# EAGLE board Serial_LCD (EAGLE 6.5.0)
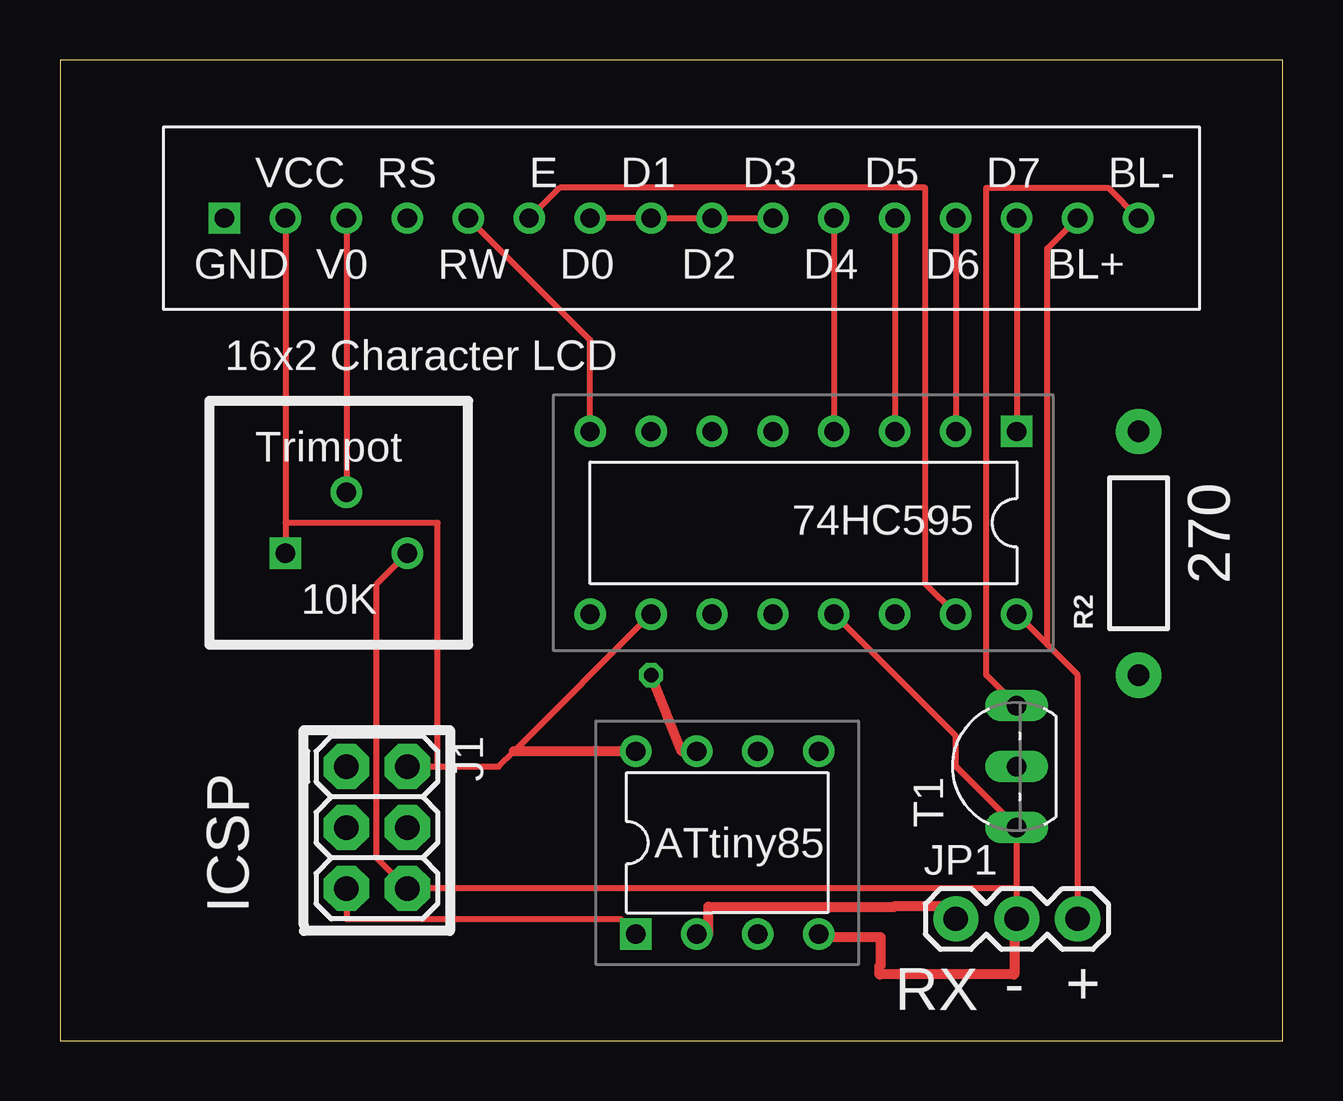
[diagram p0: board, top side]
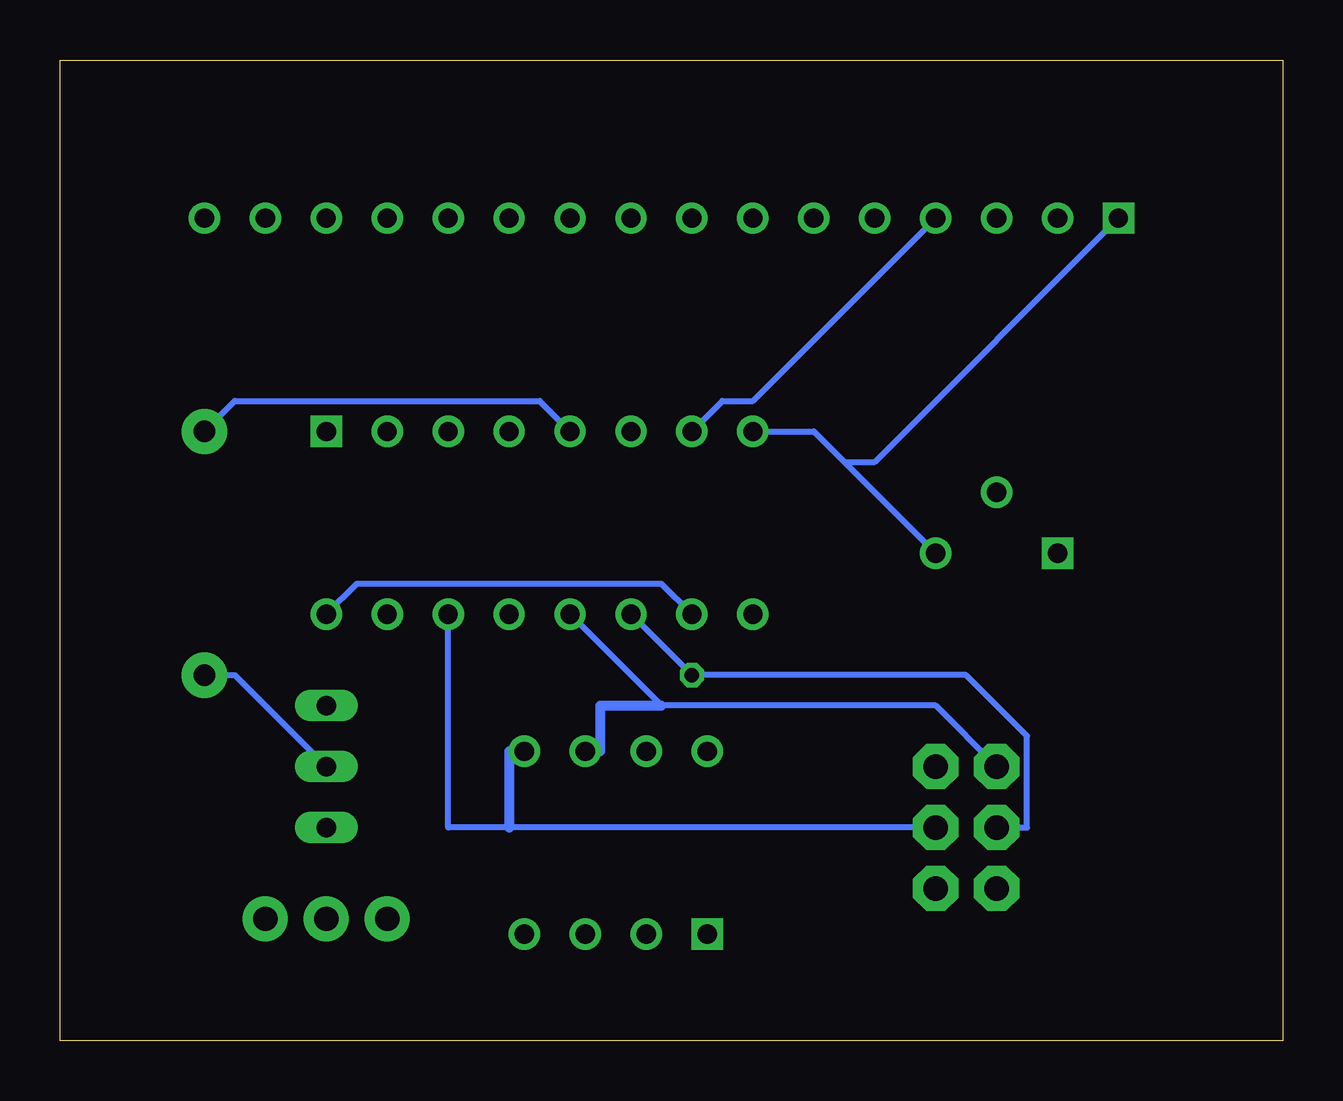
[diagram p1: board, bottom side, seen from below]

Size 50.98 x 40.88 mm. Coordinates in mm from the lower left corner, seen from the top.
Outline: 0,0 50.98,0 50.98,40.88 0,40.88 0,0
Copper layers (1*16): Top 0.035mm / dielectric 1.5mm / Bottom 0.035mm
Design rules "default": minimum track width 10mil, minimum drill 24mil, track to track 8mil, track to pad 8mil, pad to pad 8mil, via to via 8mil, smd to smd 8mil, copper to edge 40mil, drill to drill 8mil, minimum pad ring 10mil, minimum via ring 8mil, stop-mask expansion 4mil, vias tented up to drill 0mil, thermal gap 10mil

## Footprints (pad centres in the part's own frame; a part is rotated, then mirrored left to right if it is on the bottom)
2X3 = drill 1.016 pad 1.88 octagon: 1 0,0; 2 0,2.54; 3 2.54,0; 4 2.54,2.54; 5 5.08,0; 6 5.08,2.54
1X03 = drill 1.016 pad 1.88: 1 0,0; 2 2.54,0; 3 5.08,0
TRIMPOT-3386P = drill 0.8 square: P1 1.27,1.27 | drill 0.8: P2 3.81,3.81; P3 6.35,1.27
AXIAL-0.4 = drill 0.9 pad 1.88: P$1 -5.08,0; P$2 5.08,0
TO92-EBC-OVAL = drill 0.813 long: B 0,-1.27; C 2.54,-1.27; E -2.54,-1.27
SN74HC595N = drill 0.8: GND 17.78,0; OE 7.62,7.62; QA 2.54,7.62; QC 2.54,0; QD 5.08,0; QE 7.62,0; QF 10.16,0; QG 12.7,0; QH 15.24,0; QH' 17.78,7.62; RCLK 10.16,7.62; SER 5.08,7.62; SRCLK 12.7,7.62; SRCLR 15.24,7.62; VCC 0,7.62 | drill 0.8 square: QB 0,0
ATTINY85-20PU = drill 0.8: GND 8.255,0.635; PB0 8.255,8.255; PB1 5.715,8.255; PB2 3.175,8.255; PB3 3.175,0.635; PB4 5.715,0.635; VCC 0.635,8.255 | drill 0.8 square: PB5 0.635,0.635
16X2_LCD = drill 0.8: A 36.83,1.27; D0 16.51,1.27; D1 19.05,1.27; D2 21.59,1.27; D3 24.13,1.27; D4 26.67,1.27; D5 29.21,1.27; D6 31.75,1.27; D7 34.29,1.27; E 13.97,1.27; K 39.37,1.27; RS 8.89,1.27; RW 11.43,1.27; V0 6.35,1.27; VDD 3.81,1.27 | drill 0.8 square: VSS 1.27,1.27

## Placement (x,y rotation side)
J1  AVR_SPI_PRG_6PTH  [2X3]  11.94,11.43 270 top
JP1  [1X03]  37.34,5.08 0 top
R1  [TRIMPOT-3386P]  8.13,19.05 0 top
R2  [AXIAL-0.4]  44.96,20.32 90 top
T1  2N2222  [TO92-EBC-OVAL]  38.61,11.43 90 top
U1  [SN74HC595N]  39.88,25.4 180 top
U2  [ATTINY85-20PU]  23.37,3.81 0 top
U$1  [16X2_LCD]  5.59,33.02 0 top

## Library data of the parts
J1 JP1 = SparkFun-Connectors
R1 U1 U2 U$1 = Daniel
R2 = SparkFun-Passives
T1 = adafruit

## Nets
GND: J1.6 JP1.2 R1.P3 T1.E U1.GND U1.OE U2.GND U$1.RW U$1.VSS
N$1: R1.P2 U$1.V0
N$2: R2.P$1 T1.B
N$3: T1.C U$1.K
N$4: J1.4 U1.SER U2.PB0
N$5: U1.QB U$1.D7
N$6: U1.QC U$1.D6
N$7: U1.QD U$1.D5
N$8: U1.QE U$1.D4
N$9: R2.P$2 U1.QF
N$10: U$1.D0 U$1.D1 U$1.D2 U$1.D3
N$11: U1.QH U$1.RS
N$12: U1.QA U$1.E
N$13: J1.1 U1.RCLK U2.PB1
N$14: J1.3 U1.SRCLK U2.PB2
N$15: J1.5 U2.PB5
N$18: JP1.1 U2.PB3
VCC: J1.2 JP1.3 R1.P1 U1.SRCLR U1.VCC U2.VCC U$1.A U$1.VDD

## Tracks (layer width: path | path; a pad name or v marks a point on that pad's centre or on a via)
GND
  Top 0.254: U$1.RW 22.1,29.21 U1.GND | U1.OE 37.34,12.7 37.34,11.43 T1.E 39.88,6.35 | 39.88,6.35 J1.6 13.21,7.62 13.21,19.05 R1.P3 | JP1.2 39.88,6.35
  Top 0.406: JP1.2 39.78,5.08 39.78,2.77 34.16,2.77 34.16,3.12 34.21,3.12 34.21,4.32 31.62,4.32 U2.GND
  Bottom 0.254: 18.29,24.13 19.56,25.4 U1.GND | 18.29,24.13 R1.P3 | U$1.VSS 17.02,24.13 18.29,24.13
N$1
  Top 0.254: U$1.V0 R1.P2
N$2
  Bottom 0.254: T1.B 43.69,15.24 R2.P$1
N$3
  Top 0.254: U$1.K 43.69,35.56 38.61,35.56 38.61,15.24 T1.C
N$4
  Bottom 0.254: U1.SER 34.8,8.89 32.26,8.89 J1.4
  Bottom 0.406: U2.PB0 32.26,12.06 32.26,8.89
N$5
  Top 0.254: U$1.D7 U1.QB
N$6
  Top 0.254: U$1.D6 U1.QC
N$7
  Top 0.254: U$1.D5 U1.QD
N$8
  Top 0.254: U$1.D4 U1.QE
N$9
  Bottom 0.254: U1.QF 30.99,26.67 43.69,26.67 R2.P$2
N$10
  Top 0.254: U$1.D0 U$1.D1 U$1.D2 U$1.D3
N$11
  Bottom 0.254: U$1.RS 22.1,26.67 23.37,26.67 U1.QH
N$12
  Top 0.254: U$1.E 20.83,35.56 36.07,35.56 36.07,19.05 U1.QA
N$13
  Bottom 0.254: U1.RCLK 25.91,13.97 14.48,13.97 J1.1
  Bottom 0.406: U2.PB1 28.45,12.06 28.45,13.97 25.91,13.97
N$14  (via drill 0.6)
  Top 0.406: U2.PB2 25.91,12.06 v24.64,15.24
  Bottom 0.254: U1.SRCLK v24.64,15.24 13.21,15.24 10.67,12.7 10.67,8.89 J1.3
N$15
  Top 0.254: J1.5 11.94,5.08 23.37,5.08 U2.PB5
N$18
  Top 0.406: U2.PB3 27.03,4.45 27.03,5.59 34.8,5.59 34.8,5.61 37.34,5.61 JP1.1
VCC
  Top 0.254: 41.15,16.51 42.42,15.24 JP1.3 | 41.15,16.51 U1.VCC | U$1.A 41.15,33.02 41.15,16.51 | U$1.VDD 9.4,21.59 | 9.4,21.59 R1.P1 | U1.SRCLR 18.92,12.06 18.29,11.43 15.75,11.43 | J1.2 15.75,11.43 | 9.4,21.59 15.75,21.59 15.75,11.43
  Top 0.406: U2.VCC 18.92,12.06
  Bottom 0.254: U1.VCC 38.61,19.05 25.91,19.05 U1.SRCLR

## Text on the board
_tsilk: 270 | ICSP | - | + | RX